# Altium PCB Power_Supply.PcbDoc
Units mm, origin at the board's own origin, x right, y up, seen from the top; angles counter-clockwise.
Board outline 86.74 x 87.76 mm, 4 copper layers (Top Layer, Layer 1, Layer 2, Bottom Layer), stack 1.5 mm thick; 33 components, 13 nets, 75 pads, 4 vias.
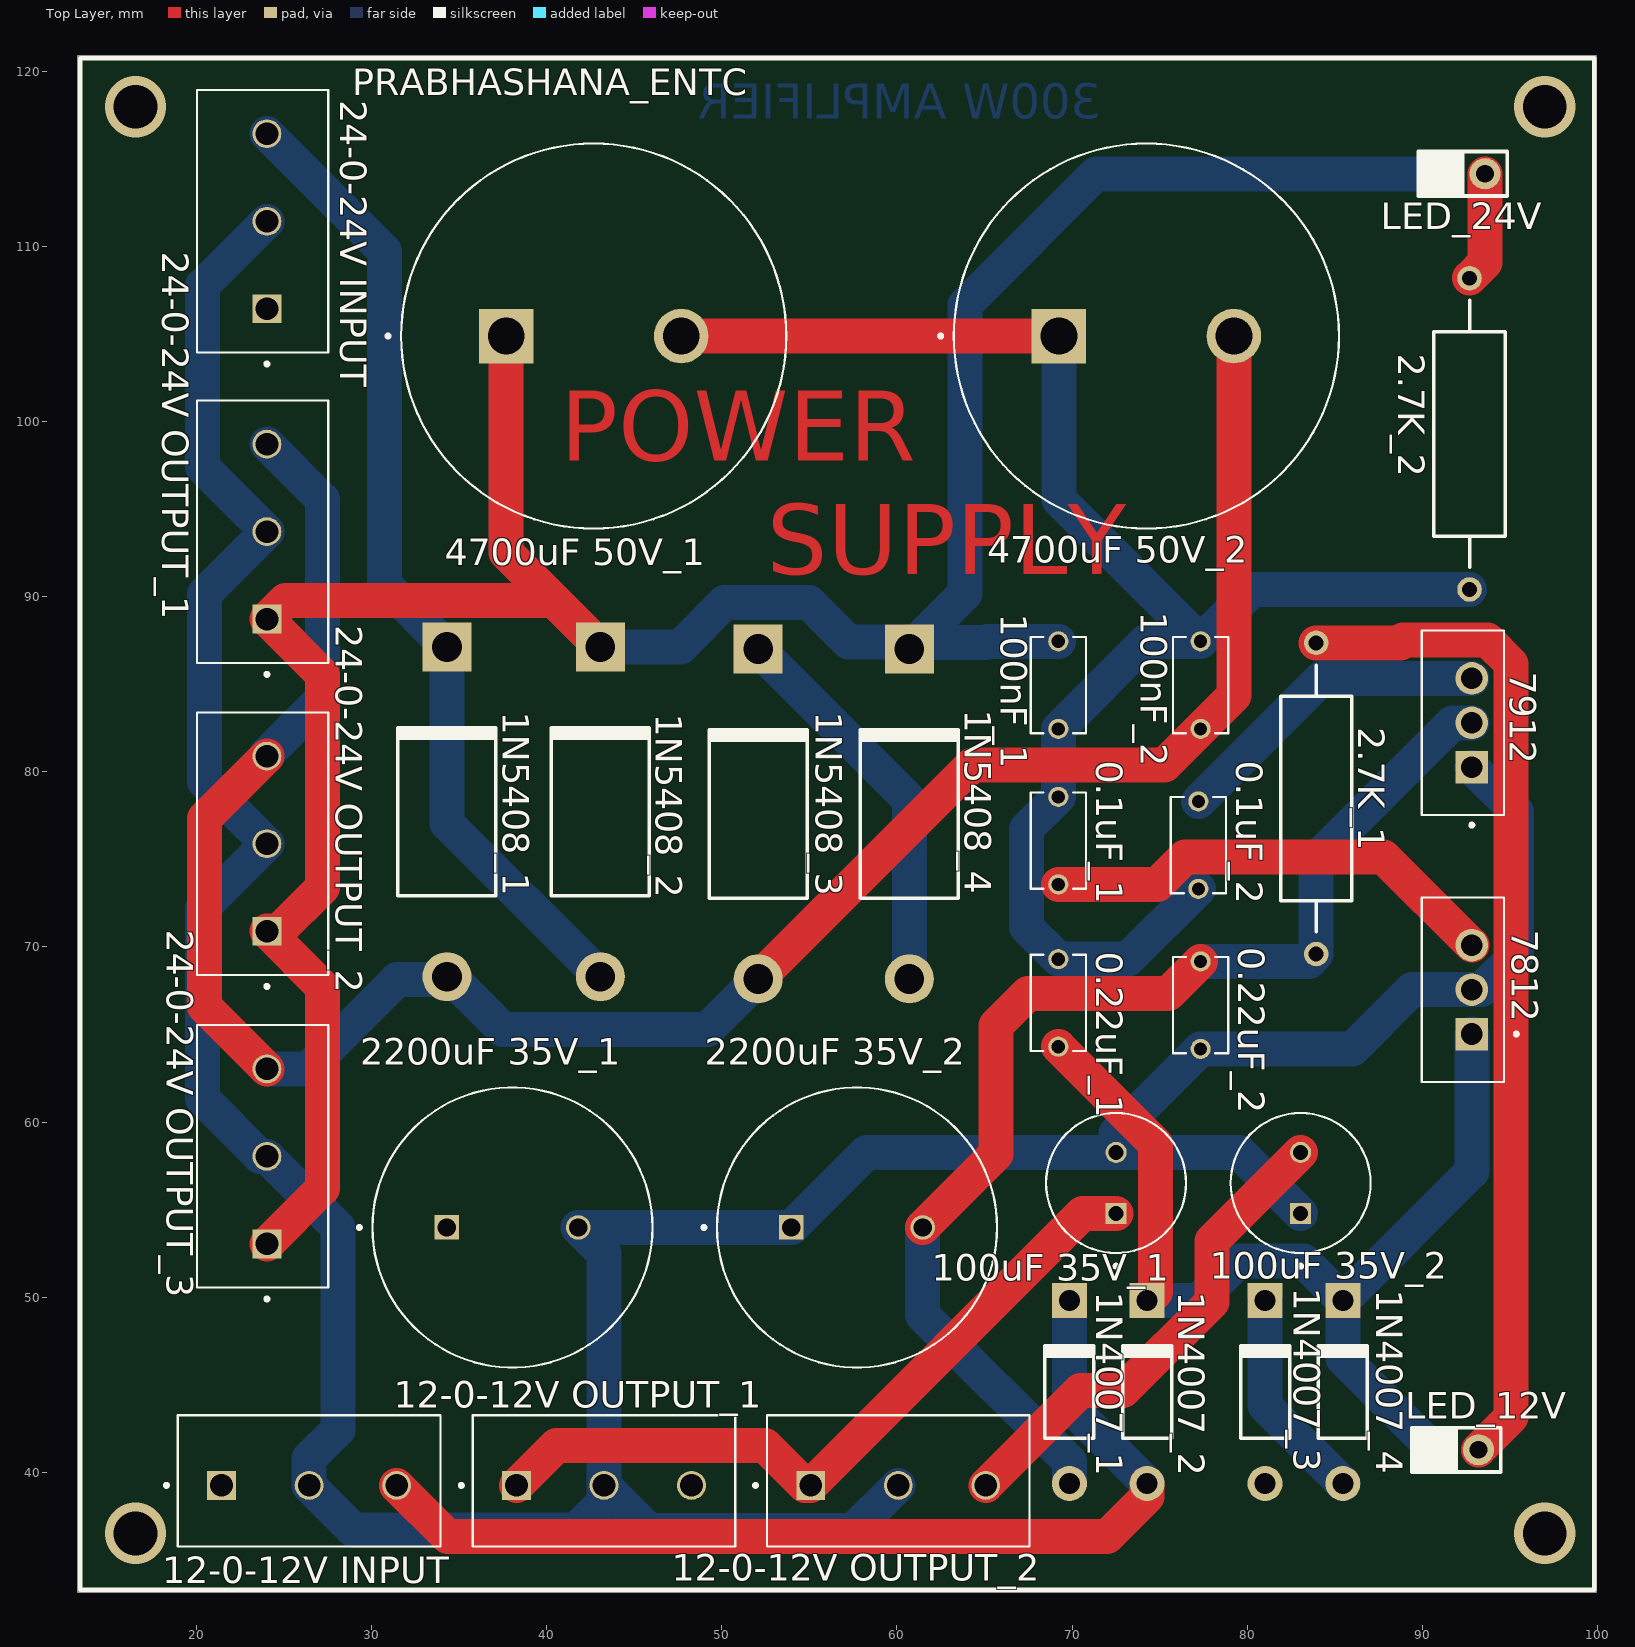
[diagram p0: Top Layer view]
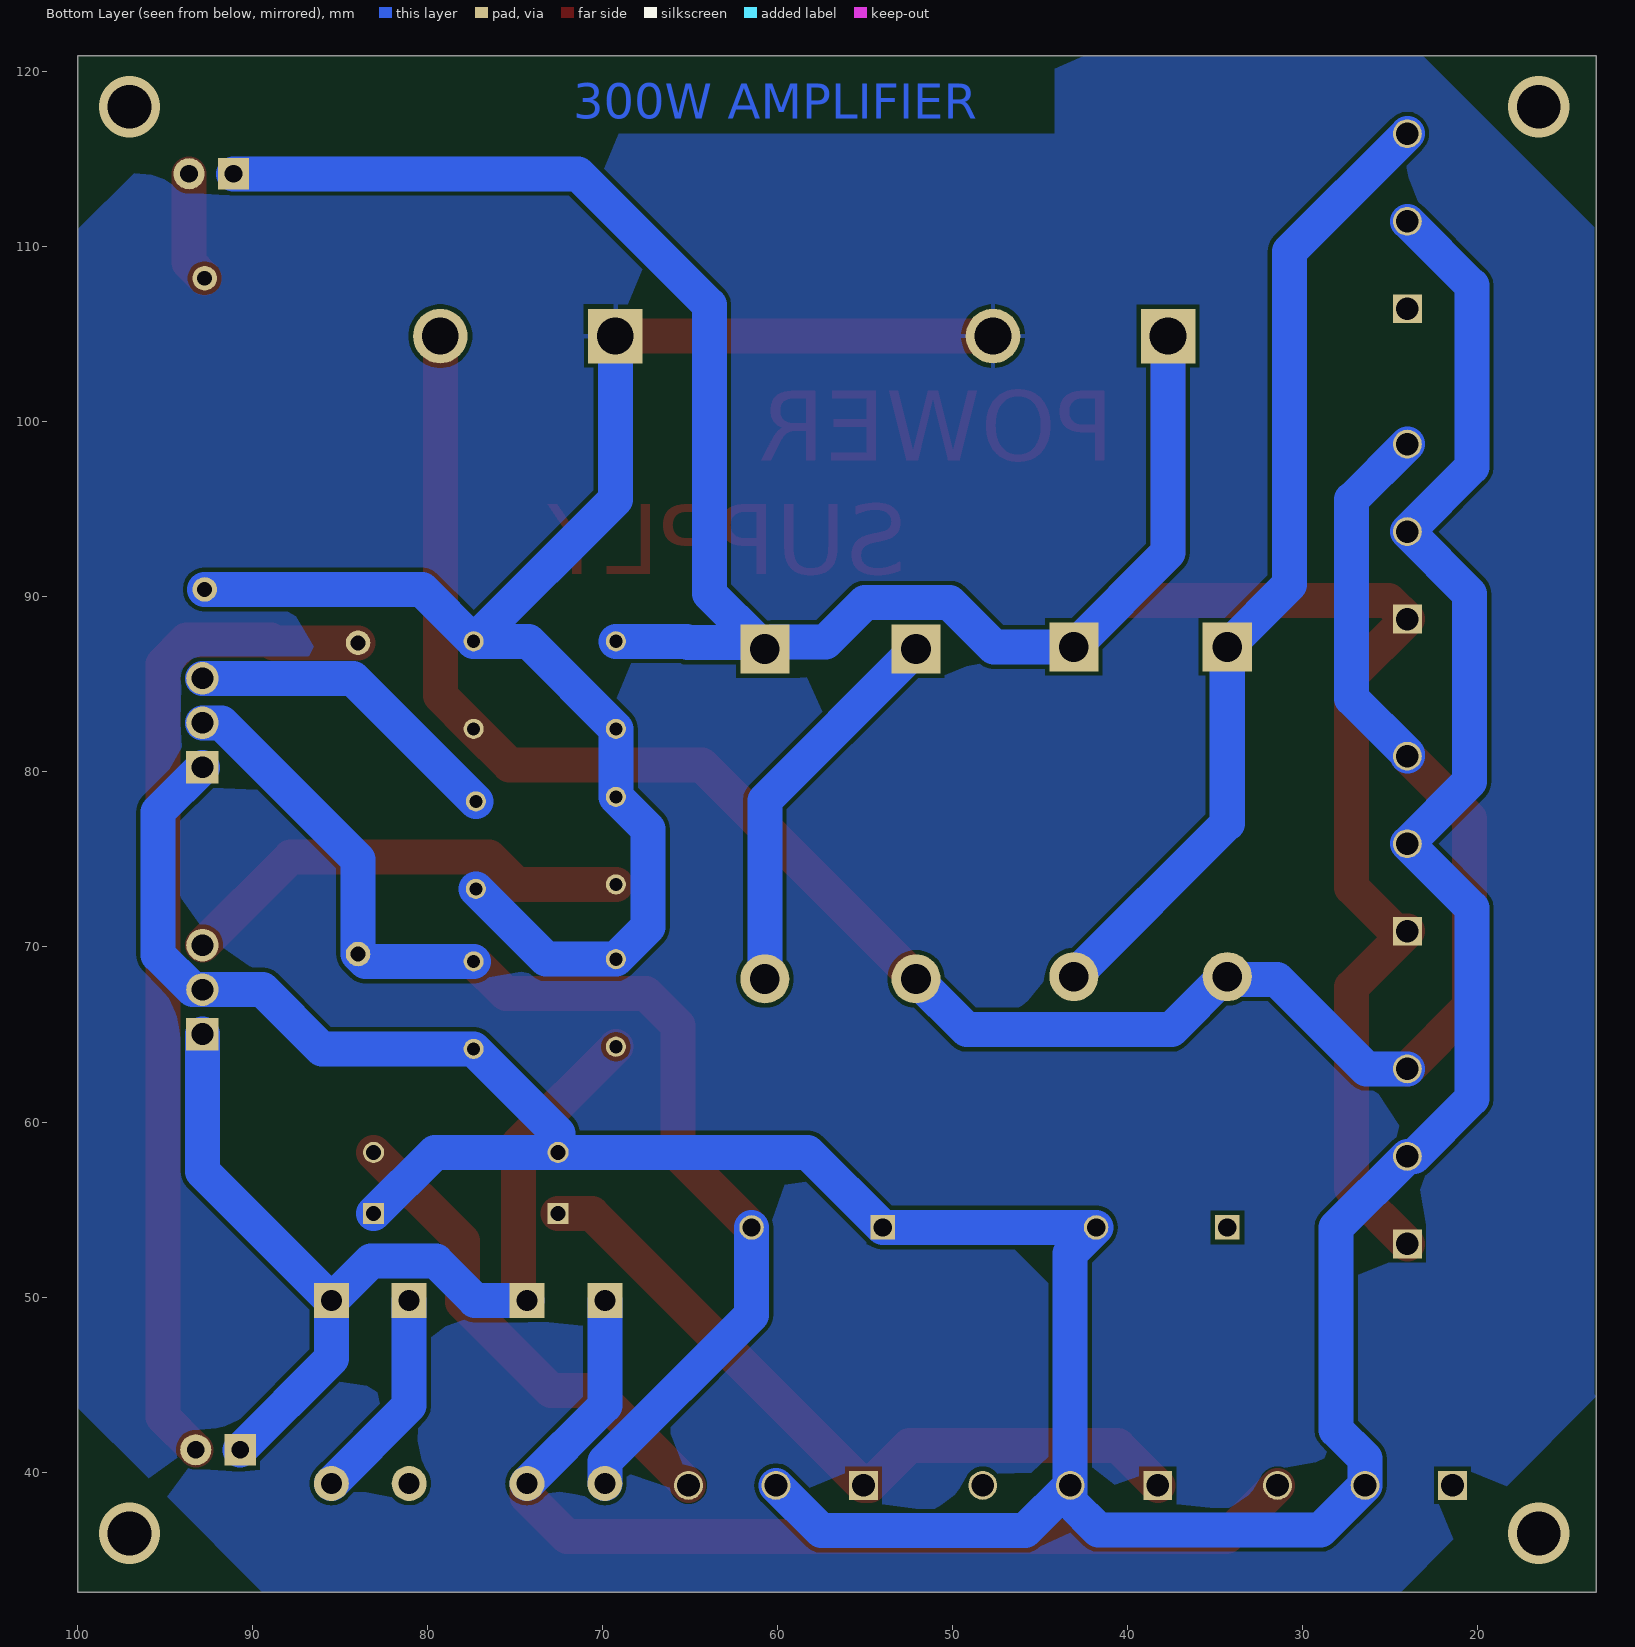
[diagram p1: Bottom Layer view, seen from below]
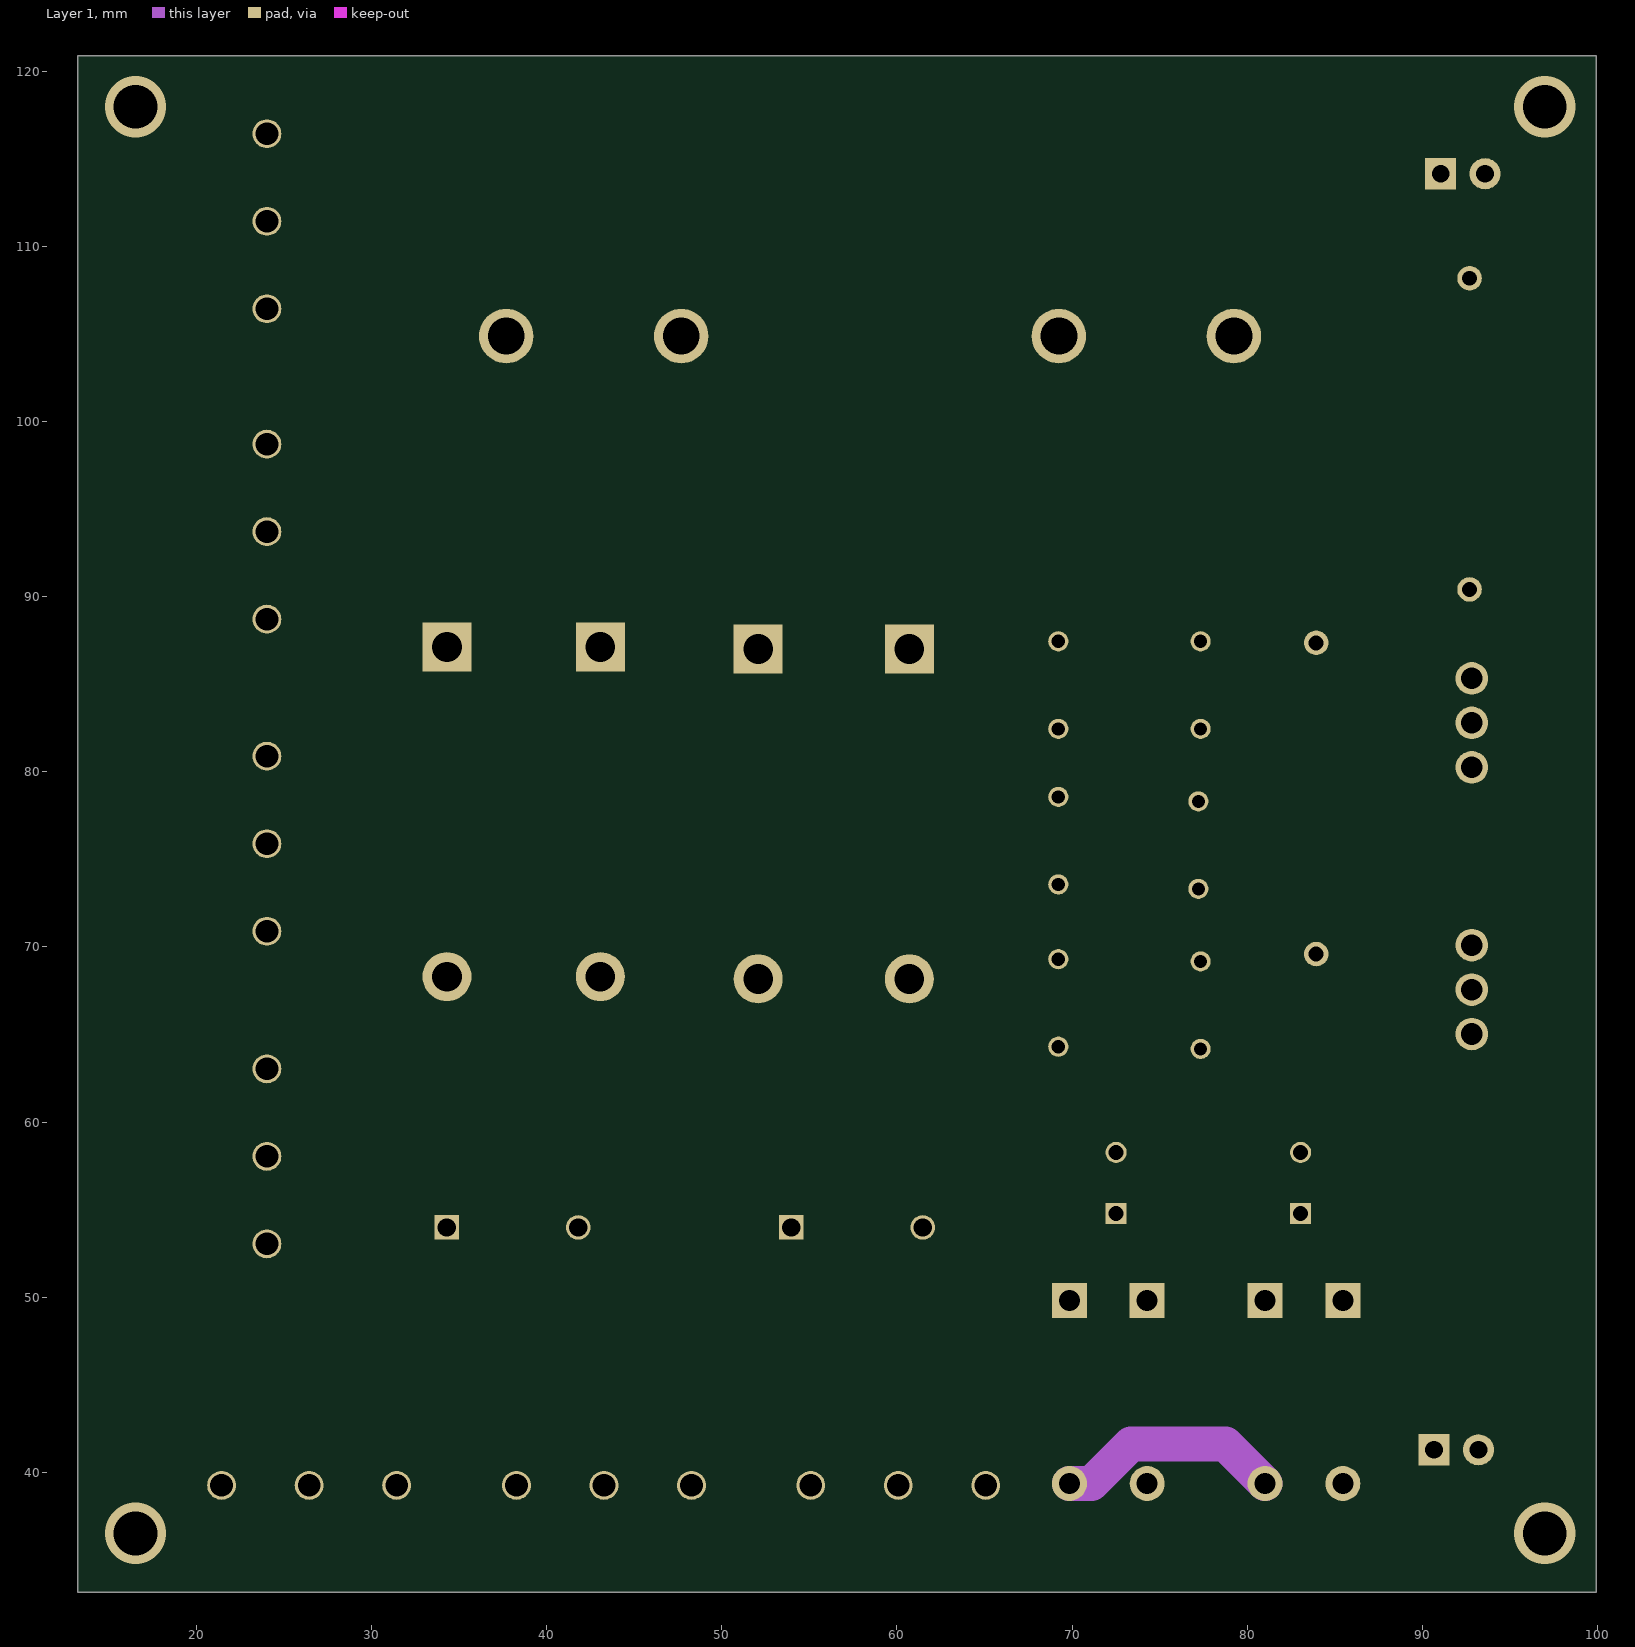
[diagram p2: Layer 1]
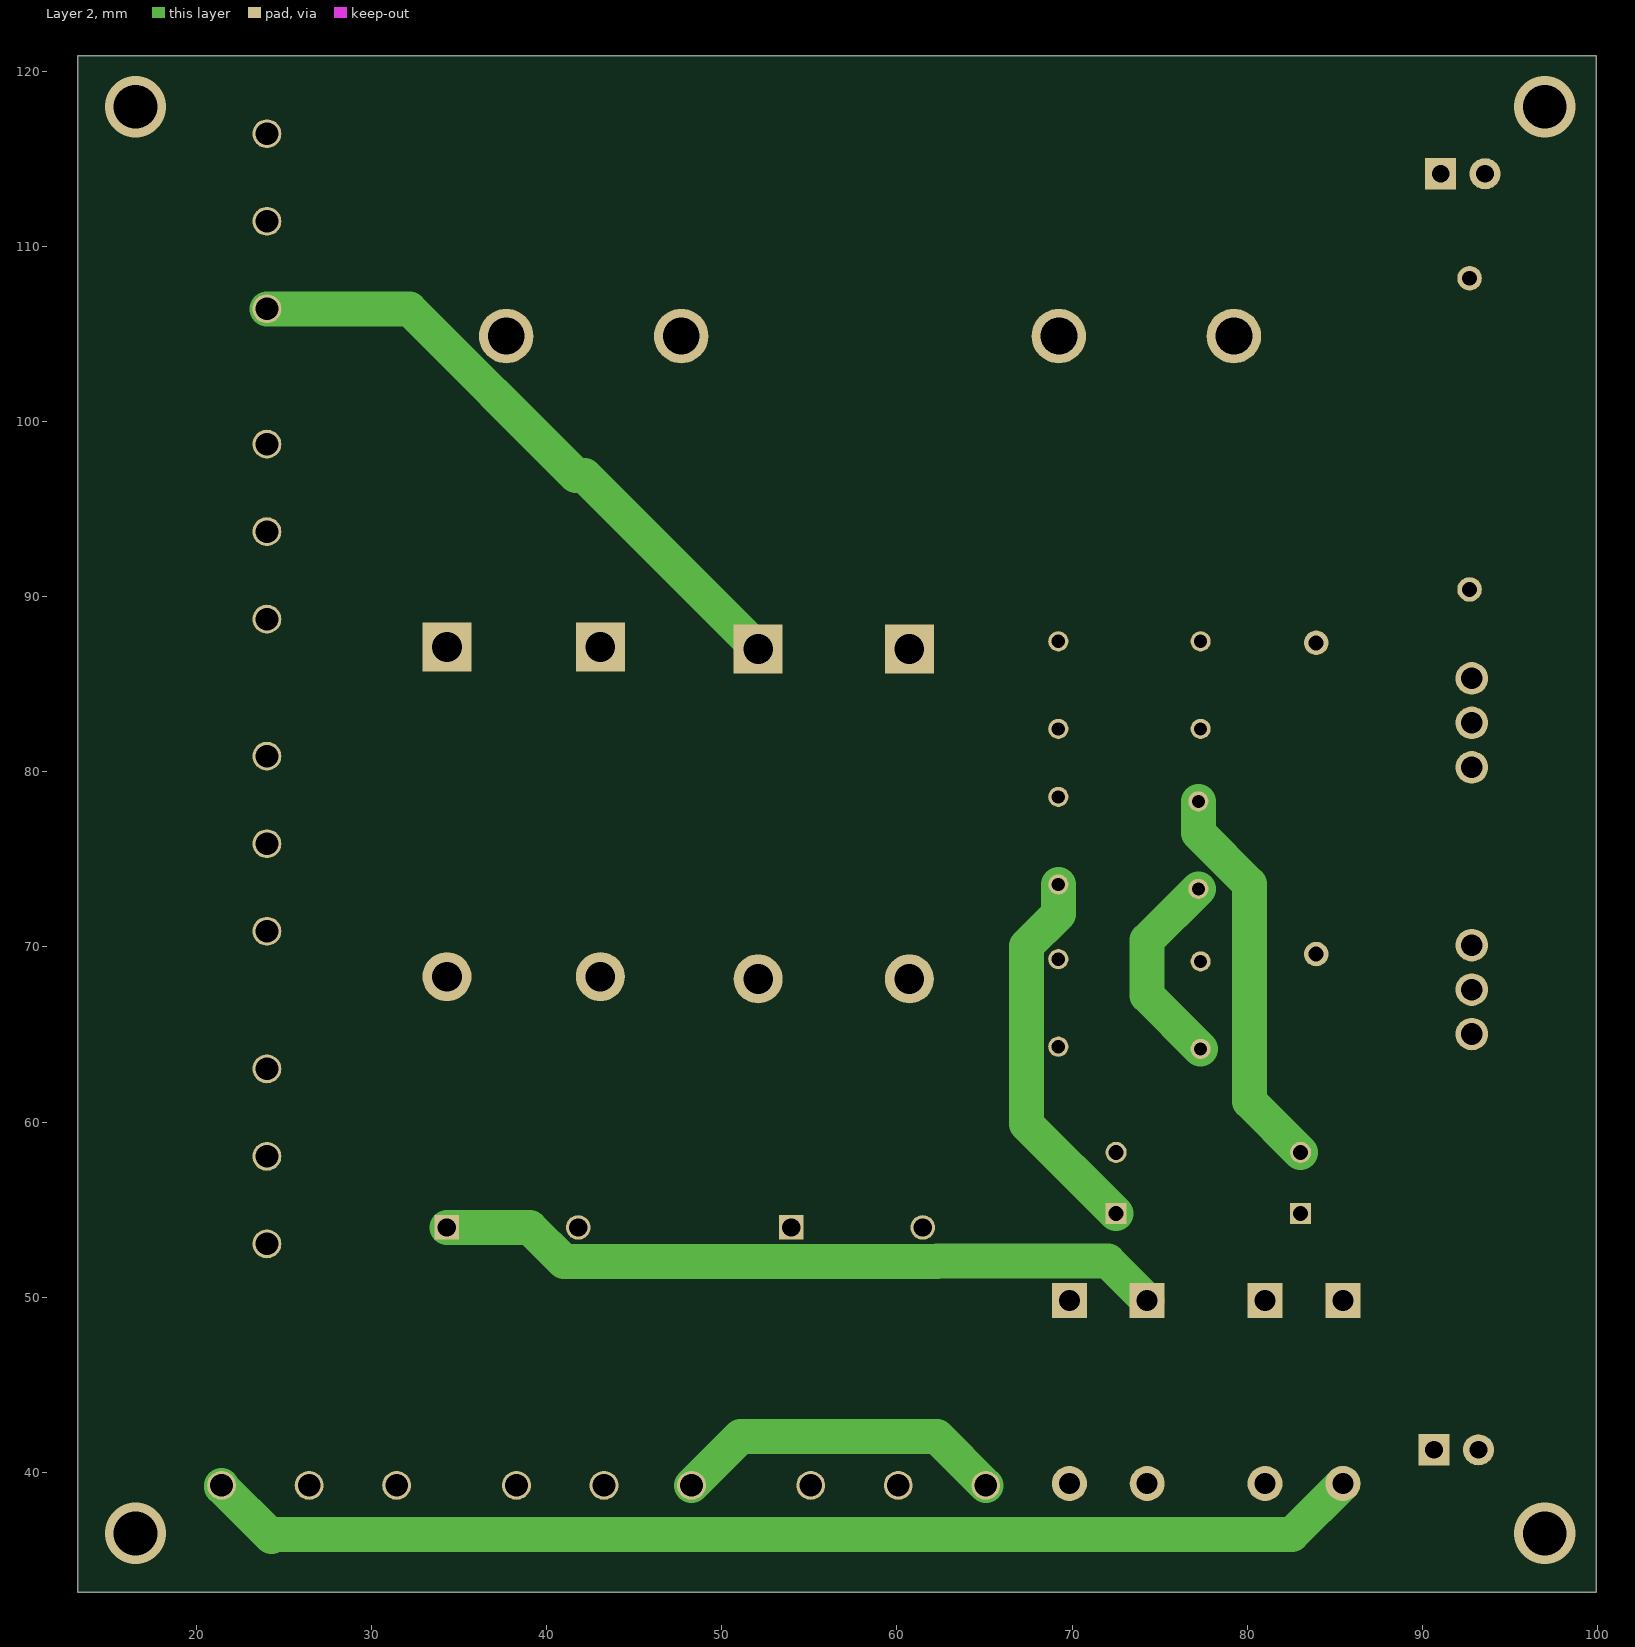
[diagram p3: Layer 2]

## Layer stack, top to bottom
Top Solder: solder mask 0.05, Solder Resist, Dk 3.5
Top Layer: signal copper 0.1
Dielectric 2: prepreg 0.2, PP-006, Dk 4.1
Layer 1: signal copper 0.2
Dielectric 1: dielectric 0.5, FR-4, Dk 4.8
Layer 2: signal copper 0.2
Dielectric 3: prepreg 0.2, PP-006, Dk 4.1
Bottom Layer: signal copper 0.1
Bottom Solder: solder mask 0.05, Solder Resist, Dk 3.5

## Board outline
13.208,33.147 99.949,33.147 99.949,120.904 13.208,120.904

## Design rules (kind name [scope] priority, off if disabled: settings)
Clearance [All] p1: gap=0.254 ignorepadtopadclearanceinfootprint=FALSE except(0: Arc-Hole Track-Hole SMDPad-Hole THPad-Hole Via-Hole Fill-Hole Poly-Hole Region-Hole Text-Hole)
Height [All] p1: minheight=0 maxheight=50 prefheight=12.7
PolygonConnect [All] p1: connectstyle=Relief reliefconductorwidth=0.254 reliefentries=4 polygonreliefangle="90 Angle" airgapwidth=0.254
RoutingVias [All] p1: holewidth=1 width=1.5 viastyle="Through Hole" minholewidth=0.5 minwidth=0.75 maxholewidth=2 maxwidth=2.5
SilkToSilkClearance [All] p1: silktosilkclearance=0
SilkToSolderMaskClearance [IsPad] p1: minsilkscreentomaskgap=0 clearancetoexposedcopper=TRUE
SolderMaskExpansion [All] p1: expansion=0.102 istentingtop=FALSE
Width [All] p1: maxlimit=2 minlimit=2 preferedwidth=2
27 further rules are at their usual default settings.

## Components (designator, comment, footprint, x,y, rotation, side; value= is the part's Value field where it differs from the comment)
0.1uF_1 "RDE5C1H273J2M1H03A" CAP_RDE5C1H273J2M1H03A 69.215,76.073 r90 top
0.1uF_2 "RDE5C1H273J2M1H03A" CAP_RDE5C1H273J2M1H03A 77.216,75.819 r90 top
0.22uF_1 "RDE5C1H273J2M1H03A" CAP_RDE5C1H273J2M1H03A 69.215,66.802 r90 top
0.22uF_2 "RDE5C1H273J2M1H03A" CAP_RDE5C1H273J2M1H03A 77.343,66.675 r90 top
1N4007_1 "Diode 1N4007" DO-41 69.85,44.577 r90 top
1N4007_2 "Diode 1N4007" DO-41 74.295,44.577 r90 top
1N4007_3 "Diode 1N4007" DO-41 81.026,44.577 r90 top
1N4007_4 "Diode 1N4007" DO-41 85.471,44.577 r90 top
1N5408_1 "Diode 1N5408" DO-201AD 34.29,77.724 r90 top
1N5408_2 "Diode 1N5408" DO-201AD 43.053,77.724 r90 top
1N5408_3 "Diode 1N5408" DO-201AD 52.07,77.597 r90 top
1N5408_4 "Diode 1N5408" DO-201AD 60.706,77.597 r90 top
2.7K_1 "Res Adj1" AXIAL-0.7 83.947,78.486 r90 top value=2.7K
2.7K_2 "Res Adj1" AXIAL-0.7 92.71,99.314 r90 top value=2.7K
"12-0-12V INPUT" "CTB5000/3" CAMDEN_CTB5000/3 26.416,39.243 r0 top
"12-0-12V OUTPUT_1" "CTB5000/3" CAMDEN_CTB5000/3 43.26,39.243 r0 top
"12-0-12V OUTPUT_2" "CTB5000/3" CAMDEN_CTB5000/3 60.071,39.243 r0 top
"24-0-24V INPUT" "CTB5000/3" CAMDEN_CTB5000/3 24.003,111.459 r90 top
"24-0-24V OUTPUT_1" "CTB5000/3" CAMDEN_CTB5000/3 24.003,93.726 r90 top
"24-0-24V OUTPUT_2" "CTB5000/3" CAMDEN_CTB5000/3 24.003,75.899 r90 top
"24-0-24V OUTPUT_3" "CTB5000/3" CAMDEN_CTB5000/3 24.003,58.039 r90 top
100nF_1 "RDE5C1H273J2M1H03A" CAP_RDE5C1H273J2M1H03A 69.215,84.963 r90 top
100nF_2 "RDE5C1H273J2M1H03A" CAP_RDE5C1H273J2M1H03A 77.343,84.963 r90 top
"100uF 35V_1" "ECA1HM101" CAPPRD350W60D800H1150 72.517,56.515 r90 top
"100uF 35V_2" "ECA1HM101" CAPPRD350W60D800H1150 83.058,56.515 r90 top
"2200uF 35V_1" "EEUFC1V222" CAPPRD750W80D1600H3150 38.033,53.975 r0 top
"2200uF 35V_2" "EEUFC1V222" CAPPRD750W80D1600H3150 57.718,53.975 r0 top
"4700uF 50V_1" "B41252A6478M060" CAP_B41252A6478M060 42.672,104.902 r0 top
"4700uF 50V_2" "B41252A6478M060" CAP_B41252A6478M060 74.248,104.902 r0 top
7812 "LM7812CT/NOPB" TO254P1054X470X1955-3 92.837,67.564 r90 top
7912 "LM7912CT/NOPB" TO254P1054X470X1955-3 92.837,82.804 r90 top
LED_12V "HEADER-1X2" HEADER-1X2 90.678,41.275 r90 top
LED_24V "HEADER-1X2" HEADER-1X2 91.059,114.173 r90 top

## Footprints (in the part's own frame and the unit in brackets; to place one, negate y for a bottom-side part, rotate by r counter-clockwise, add the part's x,y. Pads: shape width x height; smd on the part's side, far side on the other; paste and mask are expansions set on the pad)
AXIAL-0.7 [mm] "Axial Device, Thru-Hole; 2 Leads; 0.7 in Pin Spacing"
  round 1.4 hole 0.85: 1(-8.89,0) 2(8.89,0)
  silkscreen extent -7.62,-2.03 7.62,2.03
CAMDEN_CTB5000/3 [mm]
  rect 1.65x1.65 / inner round 1.65 / far side rect 1.65x1.65 hole 1.3: 01(-5,0)
  round 1.65 hole 1.3: 02(0,0) 03(5,0)
  silkscreen extent -8.25,-3.5 7.5,4
CAP_B41252A6478M060 [mm]
  rect 3.116x3.116 / inner round 3.116 / far side rect 3.116x3.116 hole 2.1: 1(-5,0)
  round 3.116 hole 2.1: 2(5,0)
  silkscreen extent -11.85,-11 11,11
CAP_RDE5C1H273J2M1H03A [mm]
  round 1.15 hole 0.75: 1(-2.5,0) 2(2.5,0)
  silkscreen extent -2.75,-1.58 2.75,1.58
CAPPRD350W60D800H1150 [mm]
  round 1.2 hole 0.85: N(1.75,0)
  rect 1.2x1.2 hole 0.85: P(-1.75,0)
  silkscreen extent -4.85,-4 4,4, body extent -4,-4 4,4, height 11.5
CAPPRD750W80D1600H3150 [mm]
  round 1.4 hole 1.05: N(3.75,0)
  rect 1.4x1.4 hole 1.05: P(-3.75,0)
  silkscreen extent -8.85,-8 8,8, body extent -8,-8 8,8, height 31.5
DO-41 [mm] "Diode, Axial; Body 5.2 x 2.7 mm (LxDia. max), Lead Dia. 0.86 mm (max)"
  round 2 hole 1.2: 1(-5.23,0)
  rect 2x2 hole 1.2: 2(5.23,0)
  silkscreen extent -2.65,-1.41 2.75,1.4
DO-201AD [mm] "Diode, Axial; Body 9.5 x 5.6 mm (LxDia. max), Lead Dia. 1.32 mm (max)"
  round 2.8 hole 1.7: 1(-9.42,0)
  rect 2.8x2.8 hole 1.7: 2(9.42,0)
  silkscreen extent -4.8,-2.8 4.9,2.8
HEADER-1X2 [mil]
  rect 70x70 hole 40: 1(0,0)
  round 70 hole 40: 2(0,-100)
  silkscreen extent -50,-150 50,50, body extent -50,-150 50,50, height 470
TO254P1054X470X1955-3 [mm]
  rect 1.86x1.86 / inner round 1.86 / far side rect 1.86x1.86 hole 1.24: 1(-2.54,0)
  round 1.86 hole 1.24: 2(0,0) 3(2.54,0)
  silkscreen extent -5.27,-2.64 5.27,2.86, body extent -5.08,-1.49 5.08,2.71, height 22.86

## Part data
0.1uF_1 0.1uF_2 0.22uF_1 0.22uF_2 100nF_1 100nF_2: "Lead Capacitor C0G_EIA_ with Capacitance: 27000pF and Rated Voltage: 50Vdc", Package=NONSTANDARD, Availability=Unavailable, MF=Murata, MP=RDE5C1H273J2M1H03A, Price=None, SnapEDA_Link=https://www.snapeda.com/parts/RDE5C1H273J2M1H03A/Murata/view-part/4544923/?ref=snap
1N4007_1 1N4007_2 1N4007_3 1N4007_4: "1 Amp General Purpose Rectifier", Code_JEDEC=DO-204-AL, ComponentLink1Description="Manufacturer Link", ComponentLink1URL=http://www.fairchildsemi.com/, ComponentLink2Description=Datasheet, ComponentLink2URL=http://www.fairchildsemi.com/ds/1N%2F1N4001.pdf, DatasheetVersion=1998, LatestRevisionDate=17-Jul-2002, LatestRevisionNote="Re-released for DXP Platform.", PackageDescription="Diode, Axial; Body 5.2 x 2.7 mm (LxDia. max), Lead Dia. 0.86 mm (max)", PackageReference=DO-41, PackageVersion=Aug-1999, Published=8-Jun-2000, Publisher="Altium Limited"
1N5408_1 1N5408_2 1N5408_3 1N5408_4: "3 Amp Medium Power Silicon Rectifier Diode", ComponentLink1Description="Manufacturer Link", ComponentLink1URL=http://www.irf.com/, DatasheetVersion=Aug-1984, LatestRevisionDate=17-Jul-2002, LatestRevisionNote="Re-released for DXP Platform.", PackageDescription="Diode, Axial; Body 9.5 x 5.3 mm (LxDia. max), Lead Dia. 1.32 mm (max)", PackageReference=DO-201AD, Published=8-Jun-2000, Publisher="Altium Limited"
2.7K_1 2.7K_2: "Variable Resistor", LatestRevisionDate=17-Jul-2002, LatestRevisionNote="Re-released for DXP Platform.", PackageDescription="Axial Device, Thru-Hole; 2 Leads; 0.7 in Pin Spacing", PackageReference=AXIAL-0.7, Published=8-Jun-2000, Publisher="Altium Limited", Set Position=0.5
"12-0-12V INPUT" "12-0-12V OUTPUT_1" "12-0-12V OUTPUT_2" "24-0-24V INPUT" "24-0-24V OUTPUT_1" "24-0-24V OUTPUT_2" "24-0-24V OUTPUT_3": Package=None, Availability=Unavailable, MP=CTB5000/3, Price=None
"100uF 35V_1" "100uF 35V_2": "100ÂµF 50V Aluminum Electrolytic Capacitors Radial, Can 2000 Hrs @ 85Â°C", Package="RADIAL-2 Panasonic", Availability="No availability data", Check_prices=https://www.snapeda.com/parts/ECA1HM101/Panasonic/view-part/4478734/?ref=eda, MF=Panasonic, MP=ECA1HM101, Price=None, SnapEDA_Link=https://www.snapeda.com/parts/ECA1HM101/Panasonic/view-part/4478734/?ref=snap
"2200uF 35V_1" "2200uF 35V_2": "2200ÂµF 35V Aluminum Electrolytic Capacitors Radial, Can 5000 Hrs @ 105Â°C", Package="RADIAL-2 Panasonic", Availability="No availability data", Check_prices=https://www.snapeda.com/parts/EEUFC1V222/Panasonic/view-part/5783312/?ref=eda, MF=Panasonic, MP=EEUFC1V222, Price=None, SnapEDA_Link=https://www.snapeda.com/parts/EEUFC1V222/Panasonic/view-part/5783312/?ref=snap
"4700uF 50V_1" "4700uF 50V_2": "CAP ALUM 4700UF 20% 50V SNAP", Package=None, Availability="In Stock", Check_prices=https://www.snapeda.com/parts/B41252A6478M060/TDK/view-part/?ref=eda, MF=TDK, MP=B41252A6478M060, Price=None, Purchase-URL=https://pricing.snapeda.com/search/part/B41252A6478M060/?ref=eda, SnapEDA_Link=https://www.snapeda.com/parts/B41252A6478M060/TDK/view-part/?ref=snap
7812: "1.5-A, 30-V, linear voltage regulator", Package=TO-220-3, Availability=Unavailable, Check_prices=https://www.snapeda.com/parts/LM7812CT/NOPB/Texas+Instruments/view-part/?ref=eda, MF="Texas Instruments", MP=LM7812CT/NOPB, Price=None, SnapEDA_Link=https://www.snapeda.com/parts/LM7812CT/NOPB/Texas+Instruments/view-part/?ref=snap
7912: "1.5-A, negative linear voltage regulator", Package="TO-220-3 Texas Instruments", Availability="In Stock", Check_prices=https://www.snapeda.com/parts/LM7912CT/NOPB/Texas+Instruments/view-part/?ref=eda, MF="Texas Instruments", MP=LM7912CT/NOPB, Price=None, Purchase-URL=https://pricing.snapeda.com/search/part/LM7912CT/NOPB/?ref=eda, SnapEDA_Link=https://www.snapeda.com/parts/LM7912CT/NOPB/Texas+Instruments/view-part/?ref=snap
LED_12V LED_24V: Supplier Part Number 1=S1011E-36-ND, REEL=TH, Supplier 1=Digi-Key

## Via types
v1: diameter 3.5, hole 2.5, Top Layer to Bottom Layer, 4 vias

## Nets (pads, with @x,y where several pads share a name; then routed paths per layer and width w, separated by ;. In a path a pad name is that pad's centre, name@x,y a point inside that pad or via, vN(x,y) a via of type N, cw(c..) or ccw(c..) an arc to the next point about the centre after c; other vN are vias at no path point)
GND: 0.1uF_1.2 0.1uF_2.1 0.22uF_1.2 0.22uF_2.1 2.7K_2.1 100nF_1.1 100nF_2.2 7812.2 7912.1 "12-0-12V INPUT.02" "12-0-12V OUTPUT_1.02" "12-0-12V OUTPUT_2.02" "24-0-24V INPUT.02" "24-0-24V OUTPUT_1.02" "24-0-24V OUTPUT_2.02" "24-0-24V OUTPUT_3.02" "100uF 35V_1.N" "100uF 35V_2.P" "2200uF 35V_1.N" "2200uF 35V_2.P" "4700uF 50V_1.2" "4700uF 50V_2.1" | length 327.2
  Top Layer w2: 47.672,104.902 69.248,104.902
  Layer 2 w2: 0.1uF_2.1 74.295,70.398 74.295,67.223 0.22uF_2.1
  Bottom Layer w2: 24.003,111.459 20.32,107.776 20.32,97.409 24.003,93.726 20.447,90.17 20.447,79.455 24.003,75.899 20.32,72.216 20.32,61.341 23.622,58.039 24.003,58.039 28.067,53.975 28.067,42.418 26.416,40.767 26.416,39.243 28.956,36.703 41.656,36.703 43.26,38.307 43.26,39.243 ; 60.071,39.243 57.484,36.656 45.847,36.656 43.26,39.243 ; 69.248,104.902 69.248,95.558 100nF_2.2 ; 0.1uF_2.1 73.199,69.302 0.22uF_1.2 67.386,71.131 67.386,76.744 0.1uF_1.2 100nF_1.1 74.215,87.463 100nF_2.2 ; 83.058,54.765 79.558,58.265 72.517,58.265 ; 2.7K_2.1 80.304,90.424 100nF_2.2 ; 7912.1 95.377,77.724 95.377,69.555 93.386,67.564 7812.2 89.408,67.564 86.019,64.175 0.22uF_2.1 72.517,59.349 72.517,58.265 ; 43.26,39.243 43.26,52.498 41.783,53.975 53.968,53.975 58.258,58.265 72.517,58.265
Net0.1uF_1_1: 0.1uF_1.1 7812.3 "12-0-12V OUTPUT_1.01" "12-0-12V OUTPUT_2.01" "100uF 35V_1.P" | length 90.6
  Top Layer w2: 38.26,39.243 40.546,41.529 52.451,41.529 54.737,39.243 55.071,39.243 70.593,54.765 72.517,54.765 ; 0.1uF_1.1 74.883,73.573 76.458,75.148 87.793,75.148 7812.3
  Layer 2 w2: 0.1uF_1.1 69.215,71.889 67.386,70.06 67.386,59.896 72.517,54.765
Net0.1uF_2_2: 0.1uF_2.2 7912.3 "12-0-12V OUTPUT_1.03" "12-0-12V OUTPUT_2.03" "100uF 35V_2.N" | length 88
  Top Layer w2: 65.071,39.243 70.482,44.654 72.916,44.654 77.987,49.725 77.987,53.194 83.058,58.265
  Layer 2 w2: 48.26,39.243 51.054,42.037 62.277,42.037 65.071,39.243 ; 0.1uF_2.2 77.216,76.507 80.137,73.586 80.137,61.186 83.058,58.265
  Bottom Layer w2: 0.1uF_2.2 84.241,85.344 7912.3
Net0.22uF_1_1: 0.22uF_1.1 1N4007_2.2 1N4007_4.2 7812.1 "2200uF 35V_1.P" LED_12V.1 | length 100.8
  Top Layer w2: 0.22uF_1.1 74.771,58.746 74.771,50.283 1N4007_2.2
  Layer 2 w2: 34.283,53.975 39.02,53.975 40.974,52.021 62.277,52.021 62.317,52.061 72.041,52.061 1N4007_2.2
  Bottom Layer w2: 1N4007_2.2 77.253,49.807 79.507,52.061 83.217,52.061 1N4007_4.2 ; LED_12V.1 85.471,46.482 1N4007_4.2 ; 7812.1 92.837,57.173 1N4007_4.2
Net0.22uF_2_2: 0.22uF_2.2 1N4007_1.1 1N4007_3.1 2.7K_1.1 7912.2 "2200uF 35V_2.N" | length 81.9
  Top Layer w2: 61.468,53.975 65.659,58.166 65.659,65.503 67.495,67.339 75.507,67.339 0.22uF_2.2
  Layer 1 w2: 1N4007_1.1 71.107,39.347 73.361,41.601 78.772,41.601 1N4007_3.1
  Bottom Layer w2: 61.468,53.975 61.468,48.986 69.85,40.604 1N4007_1.1 ; 0.22uF_2.2 83.526,69.175 2.7K_1.1 83.947,75.007 91.744,82.804 7912.2
Net1N4007_1_2: 1N4007_1.2 1N4007_2.1 "12-0-12V INPUT.03" | length 58.1
  Top Layer w2: 31.416,39.243 34.337,36.322 72.009,36.322 74.295,38.608 1N4007_2.1
  Bottom Layer w2: 1N4007_1.2 69.85,43.792 1N4007_2.1
Net1N4007_3_2: 1N4007_3.2 1N4007_4.1 "12-0-12V INPUT.01" | length 78.9
  Layer 2 w2: 21.416,39.243 21.416,39.163 24.257,36.322 24.384,36.449 82.573,36.449 1N4007_4.1
  Bottom Layer w2: 1N4007_3.2 81.026,43.792 1N4007_4.1
Net1N5408_1_1: 1N5408_1.1 1N5408_3.1 100nF_2.1 "24-0-24V OUTPUT_1.03" "24-0-24V OUTPUT_2.03" "24-0-24V OUTPUT_3.03" "4700uF 50V_2.2" | length 128.4
  Top Layer w2: 24.003,63.039 20.447,66.595 20.447,77.343 24.003,80.899 ; 1N5408_3.1 64.295,80.402 75.282,80.402 100nF_2.1 79.248,84.368 79.248,104.902
  Bottom Layer w2: 24.003,63.039 26.336,63.039 31.448,68.151 34.137,68.151 1N5408_1.1 34.461,68.304 37.487,65.278 49.171,65.278 1N5408_3.1 ; 24.003,80.899 24.003,81.026 27.178,84.201 27.178,95.551 24.003,98.726
Net1N5408_1_2: 1N5408_1.2 1N5408_2.1 "24-0-24V INPUT.03" | length 56
  Bottom Layer w2: 24.003,116.459 30.734,109.728 30.734,90.7 1N5408_1.2 34.29,77.067 1N5408_2.1
Net1N5408_2_2: 1N5408_2.2 1N5408_4.2 100nF_1.2 "24-0-24V OUTPUT_1.01" "24-0-24V OUTPUT_2.01" "24-0-24V OUTPUT_3.01" "4700uF 50V_1.1" LED_24V.1 | length 177.4
  Top Layer w2: 24.003,53.039 27.178,56.214 27.178,67.724 24.003,70.899 24.671,70.899 27.178,73.406 27.178,85.551 24.003,88.726 25.075,89.798 40.399,89.798 ; 37.672,104.902 37.672,92.525 40.399,89.798 ; 1N5408_2.2 40.399,89.798
  Bottom Layer w2: 37.672,104.902 37.672,92.525 1N5408_2.2 47.624,87.144 50.151,89.671 54.982,89.671 57.236,87.417 60.306,87.417 1N5408_4.2 1N5408_4.2@61.075,87.386 ; 100nF_1.2 65.183,87.463 65.106,87.386 1N5408_4.2@61.075,87.386 ; LED_24V.1 71.374,114.173 63.881,106.68 63.881,90.192 1N5408_4.2@61.075,87.386
Net1N5408_3_2: 1N5408_3.2 1N5408_4.1 "24-0-24V INPUT.01" | length 58.5
  Layer 2 w2: 24.003,106.459 32.138,106.459 41.659,96.938 42.149,96.938 1N5408_3.2
  Bottom Layer w2: 1N5408_3.2 60.706,78.381 1N5408_4.1
Net2.7K_1_2: 2.7K_1.2 LED_12V.2 | length 57.4
  Top Layer w2: 2.7K_1.2 88.768,87.376 88.92,87.528 93.742,87.528 95.091,86.179 95.091,43.148 LED_12V.2
Net2.7K_2_2: 2.7K_2.2 LED_24V.2 | length 6.3
  Top Layer w2: 2.7K_2.2 93.599,109.093 LED_24V.2
copper on no net:
  other v1: 16.5,36.5 97,36.5 16.5,118 97,118

## Polygon pours and split planes (outlines as drawn)
GND on Bottom Layer "GND_L04_P000" (solid, remove dead copper, pour order 0): 23.114,120.904 90.043,120.904 99.949,110.998 99.949,43.688 89.408,33.147 24.384,33.147 13.208,44.323 13.335,44.45 13.335,111.125

## Other copper
Top Layer:
  text "POWER" at 40.751,97.774 h4
  text "SUPPLY" at 52.562,91.297 h4
Bottom Layer:
  text "300W AMPLIFIER" at 71.663,117.313 h2

## Silkscreen, mask and mechanical layers (free items; w line width, h text height)
Top Overlay:
  lines w0.254: 13.335,33.274 13.335,120.777 99.822,120.777 99.822,33.274 13.335,33.274
  text "PRABHASHANA_ENTC" at 28.875,118.664 h1.52
Mechanical 1:
  lines w0.254: 13.335,33.274 13.335,120.777 99.822,120.777 99.822,33.274 13.335,33.274